# Altium PCB PCB1_SinglePlane.PcbDoc
Units mil, origin at the board's own origin, x right, y up, seen from the top; angles counter-clockwise.
Board outline 1722.27 x 1052.27 mil, 2 copper layers (Top Layer, Bottom Layer); 14 components, 12 nets, 49 pads, 0 vias.
Unrouted connection lines stored in the file: 1.
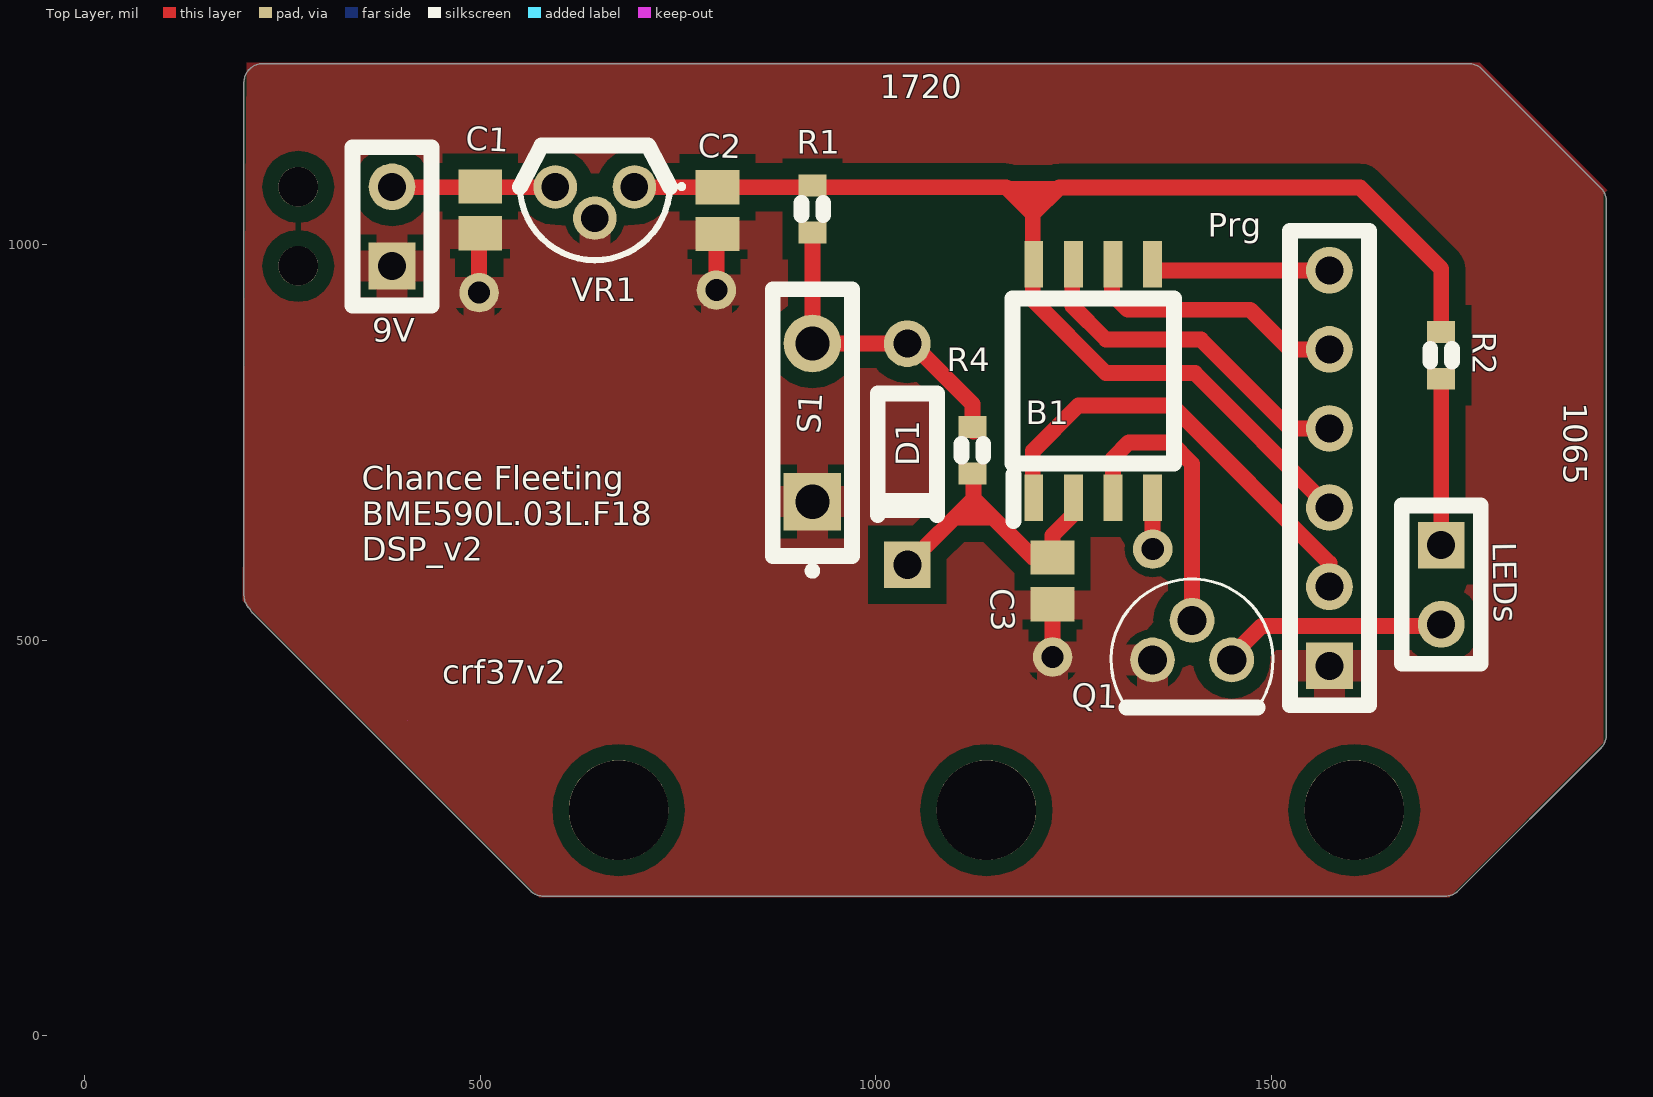
[diagram p0: Top Layer view]
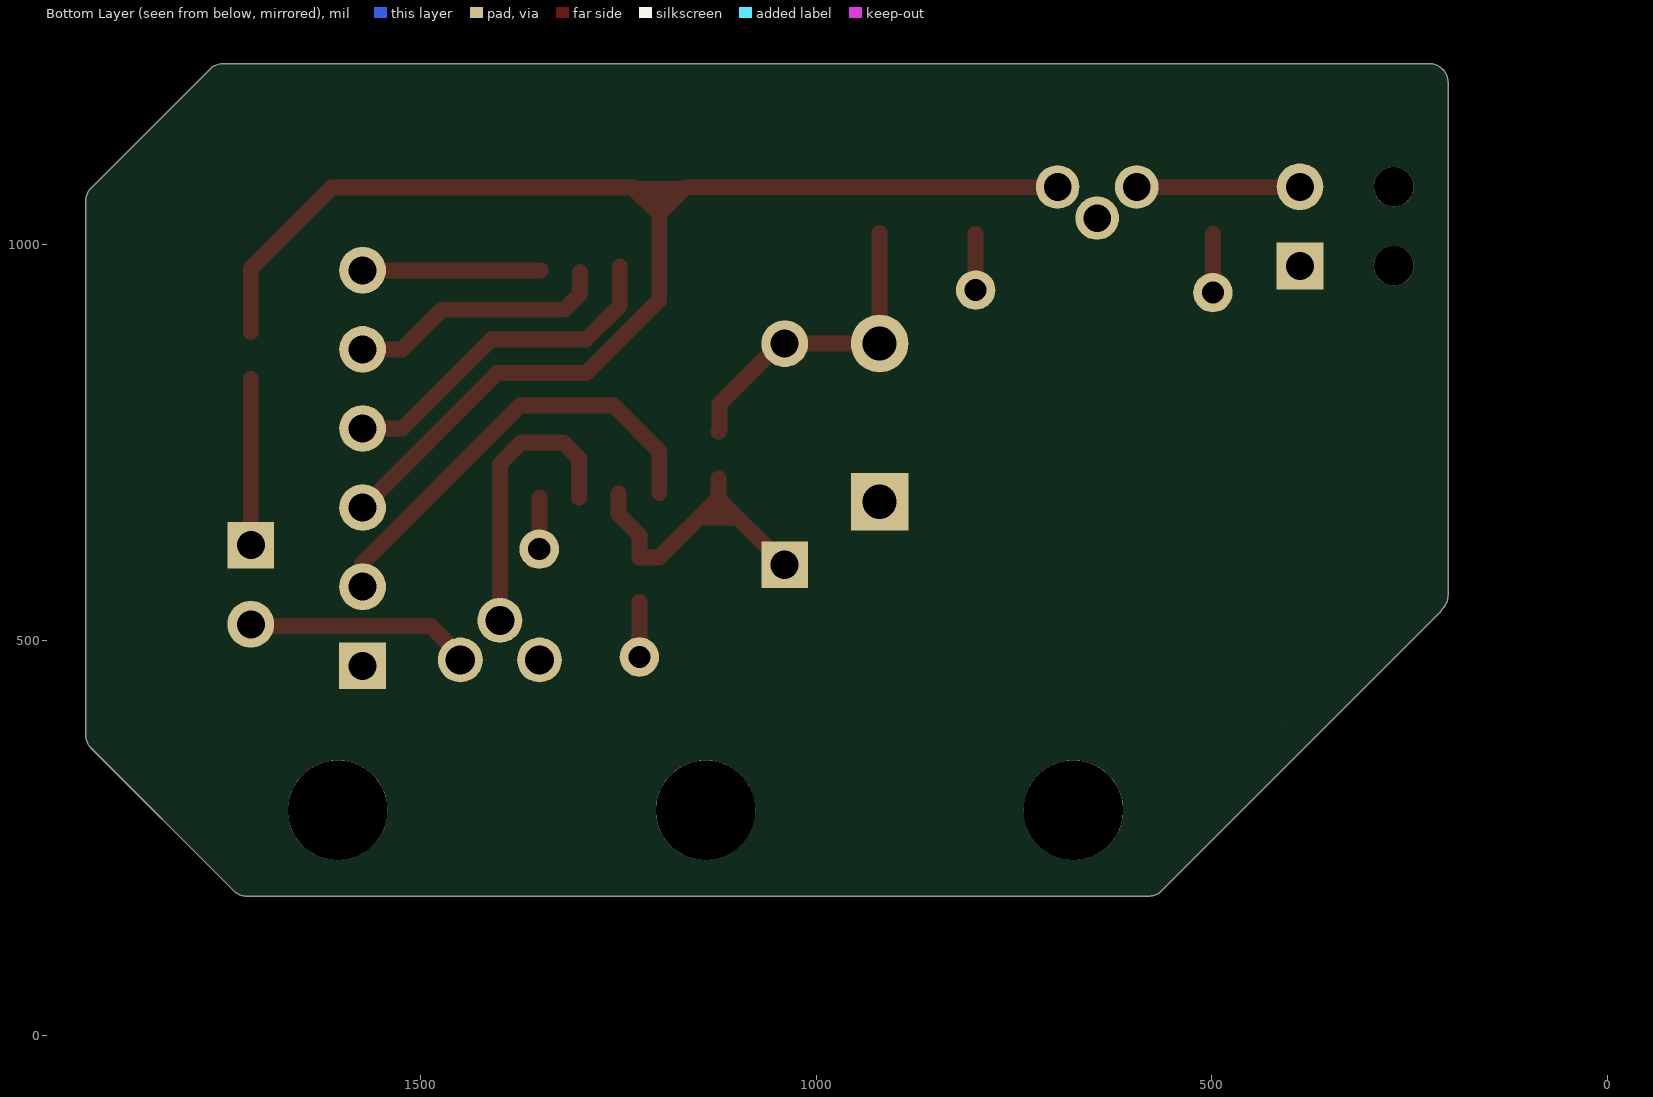
[diagram p1: Bottom Layer view, seen from below]

## Layer stack, top to bottom
Top Solder: solder mask 0.4, Solder Resist, Dk 3.5
Top Layer: signal copper 1.4
Dielectric 1: dielectric 12.6, FR-4, Dk 4.8
Bottom Layer: signal copper 1.4
Bottom Solder: solder mask 0.4, Solder Resist, Dk 3.5

## Board outline
213.29,533.29 cw(c230,550) 208.98,539.19 cw(c225,556.57) 201.36,556.57 201.36,1205 cw(c225,1205) 225,1228.64 1750,1228.64 cw(c1750,1205) 1766.71,1221.71 1916.71,1071.71 cw(c1900,1055) 1923.64,1055 1923.64,380 cw(c1900,380) 1916.71,363.29 1736.71,183.29 cw(c1720,200) 1720,176.36 580,176.36 cw(c580,200) 563.29,183.29
cut-out: 408.62,398.62

## Design rules (kind name [scope] priority, off if disabled: settings)
Clearance [All] p1: gap=10 ignorepadtopadclearanceinfootprint=TRUE except(0: Arc-Hole Track-Hole SMDPad-Hole THPad-Hole Via-Hole Fill-Hole Poly-Hole Region-Hole Text-Hole; 20: Arc-Fill Arc-Poly Arc-Region Track-Fill Track-Poly Track-Region SMDPad-Fill SMDPad-Poly SMDPad-Region THPad-Fill THPad-Poly THPad-Region Via-Fill Via-Poly Via-Region Fill-Fill Fill-Poly Fill-Region Poly-Poly Poly-Region Region-Region)
DiffPairsRouting [All] p1: maxlimit=30 minlimit=10 mostfreqgap=10 toplayer_minwidth=15 toplayer_maxwidth=30 toplayer_prefwidth=15 bottomlayer_minwidth=15 bottomlayer_maxwidth=30 bottomlayer_prefwidth=15 maxuncoupledlength=500
FanoutControl Fanout_Default [All] p1: bgadir=Out bgaviamode=Centered fanoutstyle=Auto fanoutdirection=Alternating viagrid=1 // Fanout_Default (Default Rule)
FanoutControl Fanout_Small [(CompPinCount < 5)] p2: bgadir=Out bgaviamode=Centered fanoutstyle=Auto fanoutdirection=OutThenIn viagrid=1 // Fanout_Small (Default Rule)
FanoutControl Fanout_LCC [IsLCC] p4: bgadir=Out bgaviamode=Centered fanoutstyle=Auto fanoutdirection=Alternating viagrid=1 // Fanout_LCC (Default Rule)
FanoutControl Fanout_BGA [IsBGA] p5: bgadir=Out bgaviamode=Centered fanoutstyle=Auto fanoutdirection=Alternating viagrid=1 // Fanout_BGA (Default Rule)
PlaneConnect [All] p1: pad.planeconnectstyle=Relief pad.reliefexpansion=20 pad.reliefentries=4 pad.reliefconductorwidth=20 pad.reliefairgap=10 via.planeconnectstyle=Direct via.reliefexpansion=20 via.reliefentries=4 via.reliefconductorwidth=10 via.reliefairgap=10
PolygonConnect [All] p1: connectstyle=Relief reliefconductorwidth=40 reliefentries=4 polygonreliefangle="90 Angle" airgapwidth=20
RoutingVias [All] p1: holewidth=28 width=50 viastyle="Through Hole" minholewidth=28 minwidth=50 maxholewidth=28 maxwidth=50
ShortCircuit ShortCircuit_1 [All] p2: allowed=FALSE
SolderMaskExpansion [All] p1: expansion=4
UnpouredPolygon UnpouredPolygon_1 [All] p2:
Width [All] p1: maxlimit=20 minlimit=10 preferedwidth=10 minimp=50.000000 maximp=50.000000 favimp=50.000000
Width "Schematic Width Constraint" [InNet('GND')] p2: maxlimit=20 minlimit=10 preferedwidth=20 minimp=50.000000 maximp=50.000000 favimp=50.000000
Width "Schematic Width Constraint_1" [InNetClass('Power')] p3: maxlimit=20 minlimit=20 preferedwidth=20 minimp=50.000000 maximp=50.000000 favimp=50.000000
24 further rules are at their usual default settings.

## Classes and differential pairs
net class Power: Net9V_2 VCC

## Components (designator, comment, footprint, x,y, rotation, side; value= is the part's Value field where it differs from the comment)
9V "Header 2" HDR1X2 388.62,973.03 r90 top
B1 "ATTINY85-20SU" SOT127P798X216-8N 1275,827.57 r90 top
C1 "0.47uF" C0805 500,1043.94 r90 top
C2 "0.1uF" C0805 800,1042.99 r90 top
C3 "0.47uF" C0805 1223.62,575 r90 top
D1 "Diode 1N914" DO-35 1040,735 r270 top
LEDs "Header 2" HDR1X2 1715,620 r270 top
Prg "Header 6" HDR1X6 1573.62,467.52 r90 top
Q1 "2N7000" TO-92_(TO-226) 1350,474.9 r180 top
R1 "Res3" J1-0603 920,1045 r90 top value=100K
R2 "Res3" J1-0603 1715,860 r270 top value=100K
R4 "Res3" J1-0603 1122.28,740 r90 top value=10K
S1 "SW-PB" SPST-2 920,775 r90 top
VR1 "LM78L05" LP0003A 645,1113.46 r0 top

## Footprints (in the part's own frame and the unit in brackets; to place one, negate y for a bottom-side part, rotate by r counter-clockwise, add the part's x,y. Pads: shape width x height; smd on the part's side, far side on the other; paste and mask are expansions set on the pad)
C0805 [mm] "Chip Capacitor, Body 2.0x1.3mm, IPC High Density"
  rect 1.1x1.4 smd: 1(-0.75,0) 2(0.75,0)
  body extent -1.1,-0.72 1.1,0.72, height 1.4
DO-35 [mm] "Diode, Axial; Body 3.8 x 1.9 mm (LxDia. max), Lead Dia. 0.53 mm (max)"
  round 1.5 hole 0.9: 1(-3.55,0)
  rect 1.5x1.5 hole 0.9: 2(3.55,0)
  silkscreen extent -1.95,-0.95 2.05,0.95
HDR1X2 [mm] "Connector; Header; 2 Position"
  rect 1.5x1.5 hole 0.9: 1(0,0)
  round 1.5 hole 0.9: 2(2.54,0)
  silkscreen extent -1.27,-1.27 3.81,1.27
HDR1X6 [mm] "Connector; Header; 6 Position"
  rect 1.5x1.5 hole 0.9: 1(0,0)
  round 1.5 hole 0.9: 2(2.54,0) 3(5.08,0) 4(7.62,0) 5(10.16,0) 6(12.7,0)
  silkscreen extent -1.27,-1.27 13.97,1.27
J1-0603 [mm] "Chip Resistor, Body 1.6x0.8mm, IPC High Density"
  rect 0.7x0.9 smd: 1(-0.75,0) 2(0.75,0)
  silkscreen extent -0.2,-0.35 0.2,0.35, body extent -0.85,-0.48 0.85,0.48, height 0.9
LP0003A [mm]
  round 1.4 hole 0.889: 1(1.27,-1.032) 2(0,-2.032) 3(-1.27,-1.032)
  silkscreen extent -2.41,-3.38 2.83,0.3
SOT127P798X216-8N [mm]
  rect 1.5x0.6 smd: 1(-3.75,1.905) 2(-3.75,0.635) 3(-3.75,-0.635) 4(-3.75,-1.905) 5(3.75,-1.905) 6(3.75,-0.635) 7(3.75,0.635) 8(3.75,1.905)
  silkscreen extent -4.5,-2.6 2.65,2.6
SPST-2 [mm] "Switch; 2 Leads"
  rect 1.85x1.85 hole 1.1: 1(-2.54,0)
  round 1.85 hole 1.1: 2(2.54,0)
  silkscreen extent -4.89,-1.27 4.28,1.27
TO-92_(TO-226) [mm]
  round 1.44 hole 0.94: 1(0,0) 2(-1.27,-1.27) 3(-2.54,0)
  silkscreen extent -3.87,-2.6 1.33,1.53

## Part data
9V LEDs: "Header, 2-Pin", LatestRevisionDate=17-Jul-2002, LatestRevisionNote="Re-released for DXP Platform.", Publisher="Altium Limited"
B1: "MICROCHIP - ATTINY85-20SU - MICROCONTROLLER MCU, 8 BIT, ATTINY, 20MHZ, SOIC-8", Manufacturer_Name=Microchip, RS Part Number=1331674, Arrow Part Number=ATTINY85-20SU, Arrow Price/Stock=https://www.arrow.com/en/products/attiny85-20su/microchip-technology, Datasheet Link=https://componentsearchengine.com/Datasheets/2/ATTINY85-20SU.pdf, Geometry.Height=2.16mm, Manufacturer_Part_Number=ATTINY85-20SU, RS Price/Stock=http://uk.rs-online.com/web/p/products/1331674
C1 C2 C3: library part GRM21BR71H474KA88L, "Multilayer Ceramic Capacitors MLCC - SMD/SMT 0805 0.47uF 50volts X7R 10%", Manufacturer_Name="Murata Electronics", RS Part Number=7236118P, Arrow Part Number=GRM21BR71H474KA88L, Arrow Price/Stock=https://www.arrow.com/en/products/grm21br71h474ka88l/murata-manufacturing, Datasheet Link=http://www.murata.com/~/media/webrenewal/support/library/catalog/products/capacitor/mlcc/c02e.pdf, Geometry.Height=1.45mm, Manufacturer_Part_Number=GRM21BR71H474KA88L, RS Price/Stock=http://uk.rs-online.com/web/p/products/7236118P
D1: "High Conductance Fast Diode", Code_JEDEC=DO-204-AH, ComponentLink1Description="Manufacturer Link", ComponentLink1URL=http://www.fairchildsemi.com/, ComponentLink2Description=Datasheet, ComponentLink2URL=http://www.fairchildsemi.com/ds/1N%2F1N4448.pdf, DatasheetVersion=1997, LatestRevisionDate=17-Jul-2002, LatestRevisionNote="Re-released for DXP Platform.", PackageDescription="Diode, Axial; Body 3.8 x 1.9 mm (LxDia. max), Lead Dia. 0.53 mm (max)", PackageReference=DO-35, Published=8-Jun-2000, Publisher="Altium Limited"
Prg: "Header, 6-Pin", LatestRevisionDate=17-Jul-2002, LatestRevisionNote="Re-released for DXP Platform.", Publisher="Altium Limited"
Q1: "N-channel MOSFET,2N7000 0.2A 60V", Manufacturer_Name="ON Semiconductor", RS Part Number=1698553, Arrow Part Number=2N7000, Arrow Price/Stock=https://www.arrow.com/en/products/2n7000/on-semiconductor, Datasheet Link=http://www.onsemi.com/pub/Collateral/NDS7002A-D.PDF, Manufacturer_Part_Number=2N7000, RS Price/Stock=http://uk.rs-online.com/web/p/products/1698553
R1 R2 R4: "Resistor", LatestRevisionDate=29-May-2009, LatestRevisionNote="IPC-7351 Footprint Added.", PackageDescription="Chip Resistor", PackageReference=J1-0603, Published=8-Jun-2000, Publisher="Altium Limited"
S1: "Switch", LatestRevisionDate=17-Jul-2002, LatestRevisionNote="Re-released for DXP Platform.", PackageDescription="Switch; 2 Leads", PackageReference=SPST-2, Published=24-Mar-1999, Publisher="Altium Limited"
VR1: "Voltage regulator,LM78L05ACZ 5V LM78L05ACZ/NOPB, Voltage Regulator, 0.1A 5 V,", Arrow Part Number=LM78L05ACZ/NOPB, Manufacturer_Name="Texas Instruments", RS Part Number=5359975P, Arrow Price/Stock=https://www.arrow.com/en/products/lm78l05acznopb/texas-instruments, Datasheet Link=http://www.ti.com/lit/ds/symlink/lm78l.pdf, Manufacturer_Part_Number=LM78L05ACZ/NOPB, RS Price/Stock=http://uk.rs-online.com/web/p/products/5359975P

## Free pads (board coordinates)
  round 50 hole 50: 1(270,973.03) 1(270,1073.03)
  round 50 hole 28: 1(498.62,939.31) 1(798.62,942.52) 1(1223.62,478.62) 1(1350.23,615)
  round 126 hole 126: 1(675,285) 1(1140,285) 1(1605,285)

## Nets (pads, with @x,y where several pads share a name; then routed paths per layer and width w, separated by ;. In a path a pad name is that pad's centre, name@x,y a point inside that pad or via, vN(x,y) a via of type N, cw(c..) or ccw(c..) an arc to the next point about the centre after c; other vN are vias at no path point)
GND: 9V.1 B1.4 C1.1 C2.1 C3.1 pad.1@498.62,939.31 pad.1@798.62,942.52 pad.1@1223.62,478.62 pad.1@1350.23,615 Prg.1 Q1.1 S1.1 VR1.2 | length 284.5
  Top Layer w20: pad.1@495,942.93 498.62,939.31 C1.1@498.62,1013.46 ; pad.1@798.62,942.52 C2.1@798.62,1013.46 ; pad.1@1223.62,478.62 C3.1@1223.62,547.99 ; B1.4 1350,652.11 pad.1@1350.23,615
Net9V_2: 9V.2 C1.2 VR1.3 | length 210.9
  Top Layer w20: 9V.2@389.13,1072.52 VR1.3@600,1072.52
NetB1_1: B1.1 Prg.2 | length 564.3
  Top Layer w20: B1.1@1198.62,685.98 1198.62,738.9 1256.42,796.69 1374.41,796.69 1573.62,597.48 Prg.2
NetB1_2: B1.2 C3.2 D1.2 R4.1 | length 368.9
  Top Layer w20: D1.2 1123.62,678.86 ; 1123.62,676.38 1123.62,678.86 ; R4.1@1123.62,704.57 1123.62,678.86 ; B1.2@1250,685.27 1250,658.78 1223.62,632.4 C3.2 1198.62,604.53 1124.29,678.86 1123.62,678.86
NetB1_3: B1.3 Q1.2 | length 367.7
  Top Layer w20: B1.3 1300,730 1320,750 1373.04,750 1400,723.04 Q1.2
NetB1_5: B1.5 Prg.6 | length 216.3
  Top Layer w20: B1.5@1348.62,967.2 Prg.6@1564.88,967.2
NetB1_6: B1.6 Prg.5 | length 331.6
  Top Layer w20: B1.6@1298.62,965.16 1298.62,937.52 1318.62,917.52 1473.62,917.52 1523.62,867.52 Prg.5
NetB1_7: B1.7 Prg.4 | length 436.8
  Top Layer w20: 1248.62,922.52 1291.14,880 1411.14,880 1523.62,767.52 Prg.4 ; 1248.62,924.88 B1.7@1248.62,972.52
NetD1_1: D1.1 R1.1 R4.2 S1.2 | length 403.9
  Top Layer w20: R1.1@920,1015 920,884.53 929.76,874.76 D1.1 1046.14,874.76 1122.28,798.62 1122.28,764.96 R4.2@1123.62,763.62
NetLEDs_1: LEDs.1 R2.2 | length 210
  Top Layer w20: LEDs.1 R2.2@1715,830
NetLEDs_2: LEDs.2 Q1.3 | length 280.7
  Top Layer w20: Q1.3@1450,480 1487.99,517.99 LEDs.2@1715,517.99
VCC: B1.8 C2.2 Prg.3 R1.2 R2.1 VR1.1 | length 1762.7
  Top Layer w20: VR1.1@695,1072.52 C2.2 1164.72,1072.52 1198.62,1038.62 ; Prg.3 1403.62,837.52 1291.2,837.52 1198.62,930.09 1198.62,1038.62 ; R2.1 1715,969.57 1612.52,1072.05 1232.05,1072.05 1198.62,1038.62

## Polygon pours and split planes (outlines as drawn)
no net on Mechanical 1 "Mechanical 1-No Net" (solid, shelved): 7370,4688.9
GND on Top Layer "Top Layer-GND" (solid, remove dead copper, pour order 20): 205,1230 1763.62,1230 1925,1068.62 1920,1063.62 1920,370 1725,175 575,175 200,550
no net on Top Layer "Top Layer-No Net 1" (solid, shelved, pour order 0): 228.62,1223.62

## Other copper
Top Layer:
  region net NetB1_2: 1123.62,690 1078.62,645 1168.62,645
  pour cut-out: 1535,50
  pour cut-out: 1175,930 1175,725 1380,725 1375,730 1375,930
  pour cut-out: 0,0
  pour cut-out: 1283.33,830.91
  pour cut-out: 1370.43,827.57
  pour cut-out: 1268.62,832.9
  region net VCC: 1155,1080 1245,1080 1200,1035

## Silkscreen, mask and mechanical layers (free items; w line width, h text height)
Top Overlay:
  text "1720" at 1005,1185 h30
  text "1065" at 1870,800 h30 r270
  text "Chance Fleeting / BME590L.03L.F18 / DSP_v2" at 350,600 h30
  text "crf37v2" at 452.32,445 h30

## Dimensions
735,245 to 610,320 on Top Overlay